# Altium PCB PCB.PcbDoc
Units mm, origin at the board's own origin, x right, y up, seen from the top; angles counter-clockwise.
Board outline 11.43 x 50.8 mm, 2 copper layers (Top Layer, Bottom Layer); 13 components, 13 nets, 55 pads, 8 vias.
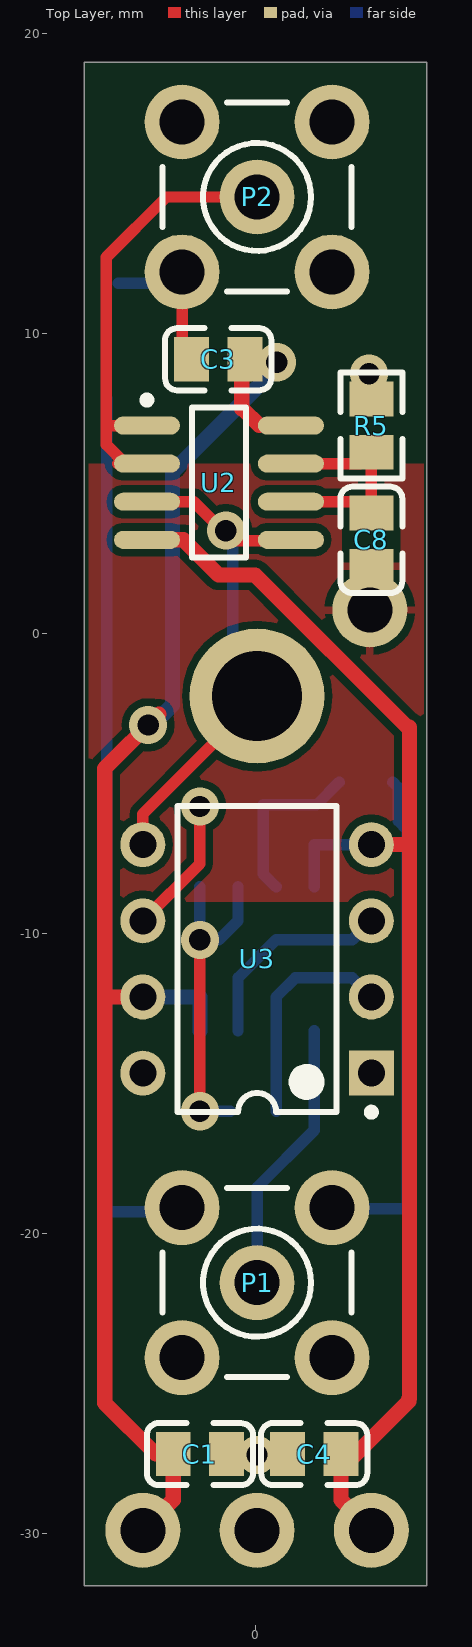
[diagram p0: Top Layer view]
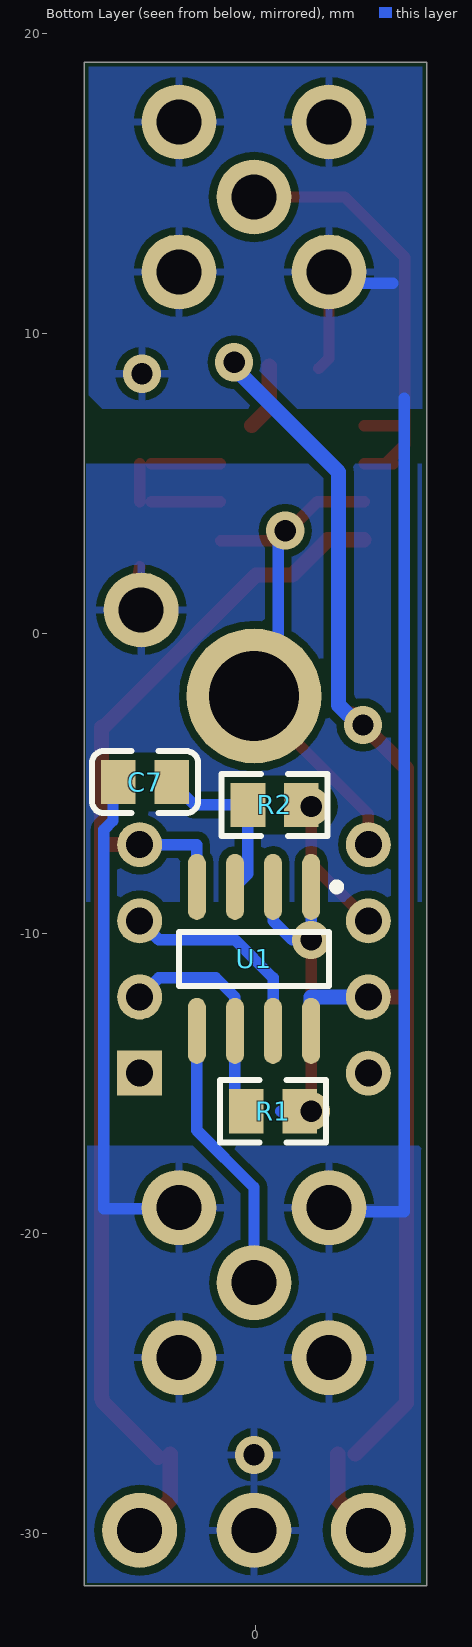
[diagram p1: Bottom Layer view, seen from below]
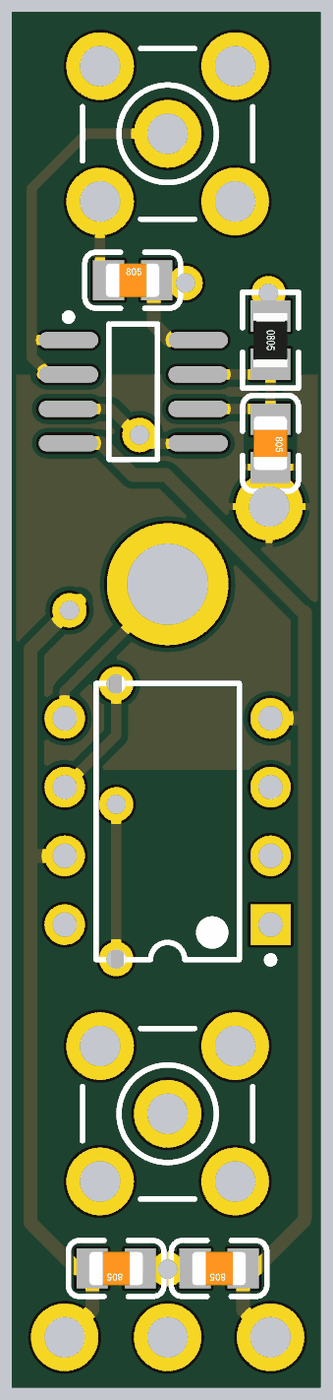
[diagram p2: 3D render of the assembled board from above, using the file's embedded part models]
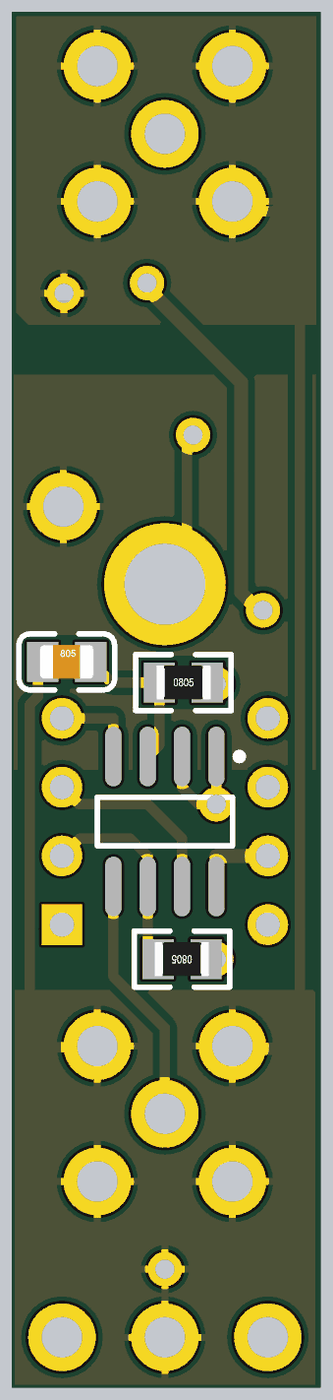
[diagram p3: 3D render of the assembled board from below, using the file's embedded part models]

## Layer stack, top to bottom
Top Solder: solder mask 0.0102, Solder Resist, Dk 3.5
Top Layer: signal copper 0.0356
Dielectric1: dielectric 0.32, FR-4, Dk 4.8
Bottom Layer: signal copper 0.0356
Bottom Solder: solder mask 0.0102, Solder Resist, Dk 3.5

## Board outline
-5.715,-31.75 5.715,-31.75 5.715,19.05 -5.715,19.05

## Design rules (kind name [scope] priority, off if disabled: settings)
Clearance [All] p1: gap=0.254
HoleSize [All] p1: absolutevalues=TRUE maxlimit=3 minlimit=0.025 maxpercent=80.000 minpercent=20.000
PolygonConnect [All] p1: connectstyle=Relief reliefconductorwidth=0.254 reliefentries=4 polygonreliefangle="90 Angle" airgapwidth=0.254
RoomDefinition Sheet [InComponentClass('Sheet')] p1: confinementstyle=ConfineIn formatcopy=TRUE lockcomponents=FALSE outline -5.664,-31.802 5.766,-31.802 5.766,18.998 -5.664,18.998
RoutingVias [All] p1: holewidth=0.711 width=1.27 viastyle="Through Hole" minholewidth=0.711 minwidth=1.27 maxholewidth=0.711 maxwidth=1.27
SolderMaskExpansion [All] p1: expansion=0.102
Width Width_1 [InNet('+12')] p1: maxlimit=1 minlimit=1 preferedwidth=1
Width [All] p2: maxlimit=0.89 minlimit=0.381 preferedwidth=0.381 minimp=50.000000 maximp=50.000000 favimp=50.000000
28 further rules are at their usual default settings.

## Components (designator, comment, footprint, x,y, rotation, side; value= is the part's Value field where it differs from the comment)
C1 "100nF(104) 10% 50V" LC-0805_C -1.854,-27.357 r180 top
C3 "100nF(104) 10% 50V" LC-0805_C -1.245,9.144 r0 top
C4 "100nF(104) 10% 50V" LC-0805_C 1.956,-27.357 r180 top
C7 "1uF (105) 10% 50V" LC-0805_C 3.683,-4.953 r180 bottom
C8 "1uF (105) 10% 50V" LC-0805_C 3.861,3.123 r270 top
P1 "SMB" SMB_V-RJ45 0.051,-21.642 r0 top
P2 "SMB" SMB_V-RJ45 0.051,14.553 r0 top
R1 "1KΩ (1001) ±1%" LC-0805_R -0.584,-15.927 r0 bottom
R2 "100KΩ (1003) ±1%" LC-0805_R -0.635,-5.715 r180 bottom
R5 "100KΩ (1003) ±1%" LC-0805_R 3.861,6.933 r270 top
U1 "AD8066AR" ADI-R-8_N 0.051,-10.847 r270 bottom
U2 "AD8066AR" ADI-R-8_N -1.219,5.028 r0 top
U3 "AD844AN" ADI-N-8 0.051,-10.847 r180 top

## Footprints (in the part's own frame and the unit in brackets; to place one, negate y for a bottom-side part, rotate by r counter-clockwise, add the part's x,y. Pads: shape width x height; smd on the part's side, far side on the other; paste and mask are expansions set on the pad)
ADI-N-8 [mm] "DIP, 8-Leads, Body 9.59x6.6mm, Pitch 2.54mm"
  rect 1.5x1.5 hole 0.9: 1(-3.81,3.81)
  round 1.5 hole 0.9: 2(-3.81,1.27) 3(-3.81,-1.27) 4(-3.81,-3.81) 5(3.81,-3.81) 6(3.81,-1.27) 7(3.81,1.27) 8(3.81,3.81)
  silkscreen extent -3.94,-5.1 2.65,5.23, body extent -3.95,-5.08 3.95,5.08, height 5.33
ADI-R-8_N [mm] "SOIC, 8-Leads, Body 4.9x3.9mm, Pitch 1.27mm, IPC Medium Density"
  oval 2.2x0.6 smd: 1(-2.4,1.905) 2(-2.4,0.635) 3(-2.4,-0.635) 4(-2.4,-1.905) 5(2.4,-1.905) 6(2.4,-0.635) 7(2.4,0.635) 8(2.4,1.905)
  silkscreen extent -2.52,-2.5 0.9,2.88, body extent -2,-2.5 2,2.5, height 1.75
LC-0805_C [mm]
  rect 1.16x1.47 smd: 1(-0.89,0) 2(0.89,0)
  silkscreen extent -1.77,-1.04 1.77,1.04, body extent -1,-0.62 1,0.63, height 0.77
LC-0805_R [mm]
  rect 1.16x1.47 smd: 1(-0.89,0) 2(0.89,0)
  silkscreen extent -1.77,-1.03 1.77,1.03, body extent -1,-0.63 1,0.62, height 0.49
SMB_V-RJ45 [mm] "Connector; SMB Straight"
  round 2.5 hole 1.5: 1(0,0) 2(-2.5,-2.5) 2(-2.5,2.5) 2(2.5,-2.5) 2(2.5,2.5)
  silkscreen extent -3.15,-3.15 3.15,3.15

## Part data
C1 C3 C4: library part "0805 100nF(104) 10% 50V", "贴片电容"
C7 C8: library part "0805 1uF (105) 10% 50V", "贴片电容"
P1 P2: "SMB Straight Connector"
R1: library part "0805 1KΩ (1001) 1%", "贴片电阻"
R2 R5: library part "0805 100KΩ (1003) 1%", "贴片电阻"
U1 U2: "Double Channel Low Power Operational Amplifier, 145 MHz BW, 180 V/us SR, Industrial, 8-pin SOIC (R-8), Tube"
U3: "Single Channel Wide Bandwidth Operational Amplifier, 60 MHz BW, 2 KV/us SR, Industrial, 8-pin DIP (N-8), Tube"

## Free pads (board coordinates)
  round 2.5 hole 1.5: 0(-3.759,-29.897) 0(0.051,-29.897) 0(3.81,0.786) 0(3.861,-29.897)
  round 4.5 hole 3: 0(0.051,-2.084)

## Via types
v1: diameter 1.27, hole 0.711, Top Layer to Bottom Layer, 8 vias

## Nets (pads, with @x,y where several pads share a name; then routed paths per layer and width w, separated by ;. In a path a pad name is that pad's centre, name@x,y a point inside that pad or via, vN(x,y) a via of type N, cw(c..) or ccw(c..) an arc to the next point about the centre after c; other vN are vias at no path point)
+12: C1.2 C3.2 pad.0@-3.759,-29.897 U1.8 U2.8 U3.7 | length 48.7
  Top Layer w0.508: pad.0@-3.759,-29.897 -2.744,-28.882 C1.2 ; U3.7 -5.029,-12.117 ; -3.326,-27.357 -5.029,-25.654 -5.029,-12.117 ; v1@-3.226,-2.693 -5.029,-4.497 -5.029,-12.117 ; -0.457,7.493 C3.2@-0.457,8.915 ; -0.432,7.493 U2.8@0.127,6.934
  Bottom Layer w0.508: U3.7 -1.854,-12.117 U1.8 ; v1@-3.099,-2.718 -2.769,-2.388 -2.769,5.384 v1@0.686,8.838
  other v1: -3.581,-3.048 0.711,9.042
-12: C4.1 pad.0@3.861,-29.897 U1.4 U2.4 U3.4 | length 44
  Top Layer w0.508: U2.4 -2.404,3.123 -1.235,1.955 -0.012,1.955 5.099,-3.157 ; C4.1 2.846,-28.882 pad.0@3.861,-29.897 ; C4.1@3.251,-27.457 5.105,-25.603 5.105,-25.527 5.131,-25.502 5.131,-7.037 ; U3.4 5.131,-7.037 ; 5.131,-3.125 5.131,-7.037
  Bottom Layer w0.381: U1.4 1.956,-7.037 U3.4
GND: C1.1 C3.1 C4.2 C7.1 P1.2 P2.2 pad.0@0.051,-29.897 R5.1 | length 51.5
  Top Layer w0.381: P2.2@-2.449,12.053 -2.449,9.178 C3.1@-2.109,8.838
  Bottom Layer w0.381: -4.954,7.849 -4.954,-19.28 P1.2@-2.587,-19.28 ; -4.572,11.683 P2.2@-2.819,11.683 ; P1.2@2.587,-19.178 5.055,-19.178 5.055,-6.542 4.751,-6.238 4.751,-5.131 C7.1
  other v1: 0.051,-27.382 3.785,8.661
IMSK: C8.2 pad.0@3.81,0.786 | length 1.7
  Top Layer w0.381: C8.2 pad.0@4.115,0.583
IOUT: pad.0@0.051,-2.084 U2.3 U2.5 U3.5 | length 16.1
  Top Layer w0.381: U3.5 -3.759,-6.021 pad.0@0.051,-2.211 ; U2.3 -2.057,4.393 -0.762,3.098 U2.5@1.155,3.098
  Bottom Layer w0.381: pad.0@-0.762,-1.271 v1@-0.762,3.098
  other v1: -0.991,3.429
NetC7_2: C7.2 R2.1 U1.3 | length 5.8
  Bottom Layer w0.381: U1.3 0.255,-8.016 R2.1 2.031,-5.715 C7.2
NetC8_1: C8.1 R5.2 U2.6 U2.7 | length 5.9
  Top Layer w0.381: U2.6 C8.1@3.481,4.393 ; U2.7 R5.2@3.481,5.663 ; C8.1@3.861,4.393 R5.2@3.861,5.663
NetP1_1: P1.1 U1.5 | length 9.2
  Bottom Layer w0.381: P1.1 0.051,-18.467 1.956,-16.562 U1.5
NetP2_1: P2.1 U2.1 U2.2 | length 15.3
  Top Layer w0.381: U2.2@-4.596,5.663 U2.2 ; U2.2@-4.356,5.677 -4.978,6.299 -4.978,6.933 ; U2.1 -4.978,6.933 ; P2.1 -2.972,14.553 -4.978,12.547 -4.978,6.933
NetR1_1: R1.1 U1.1 U1.2 | length 11.2
  Top Layer w0.381: v1(-1.854,-15.927) v1(-1.854,-10.212)
  Bottom Layer w0.381: v1(-1.854,-15.927) -0.839,-15.927 ; U1.1 v1(-1.854,-10.212) -1.219,-10.212 -0.584,-9.577 U1.2
NetR1_2: R1.2 U1.6 U3.2 | length 7.5
  Bottom Layer w0.381: R1.2@0.686,-15.927 U1.6 0.686,-12.117 1.321,-11.482 3.226,-11.482 U3.2
NetR2_2: R2.2 U3.6 | length 4.6
  Top Layer w0.381: U3.6 -1.854,-7.672 v1(-1.854,-5.767)
NetU1_7: U1.7 U3.3 | length 7
  Bottom Layer w0.381: U1.7 -0.584,-11.482 0.686,-10.212 3.226,-10.212 U3.3
pads on no net: U3.1 U3.8

## Polygon pours and split planes (outlines as drawn)
IMSK on Bottom Layer "Bottom Layer-No Net" (solid, pour order 2): -5.537,5.663 5.639,5.663 5.639,-8.942 -5.537,-8.942 -5.537,6.298
GND on Bottom Layer "Bottom Layer-No Net" (solid, pour order 6): -5.537,-17.07 5.613,-17.07 5.613,-31.649 -5.512,-31.649 -5.512,-17.248
GND on Bottom Layer "Bottom Layer-No Net" (solid, pour order 10): -5.563,18.898 5.563,18.898 5.563,7.95 5.512,7.899 5.105,7.493 -5.563,7.493 -5.563,18.898
IMSK on Top Layer "Bottom Layer-No Net" (solid, pour order 4): -5.563,5.663 5.613,5.663 5.613,-8.942 -5.563,-8.942 -5.563,5.663

## Silkscreen, mask and mechanical layers (free items; w line width, h text height)
Mechanical 1:
  the board outline again, w0.254